# Altium PCB Solo_Edison.PcbDoc
Units mm, origin at the board's own origin, x right, y up, seen from the top; angles counter-clockwise.
Board outline 76.36 x 81.86 mm, 2 copper layers (Top Layer, Bottom Layer), stack 1.571 mm thick; 47 components, 99 nets, 304 pads, 76 vias.
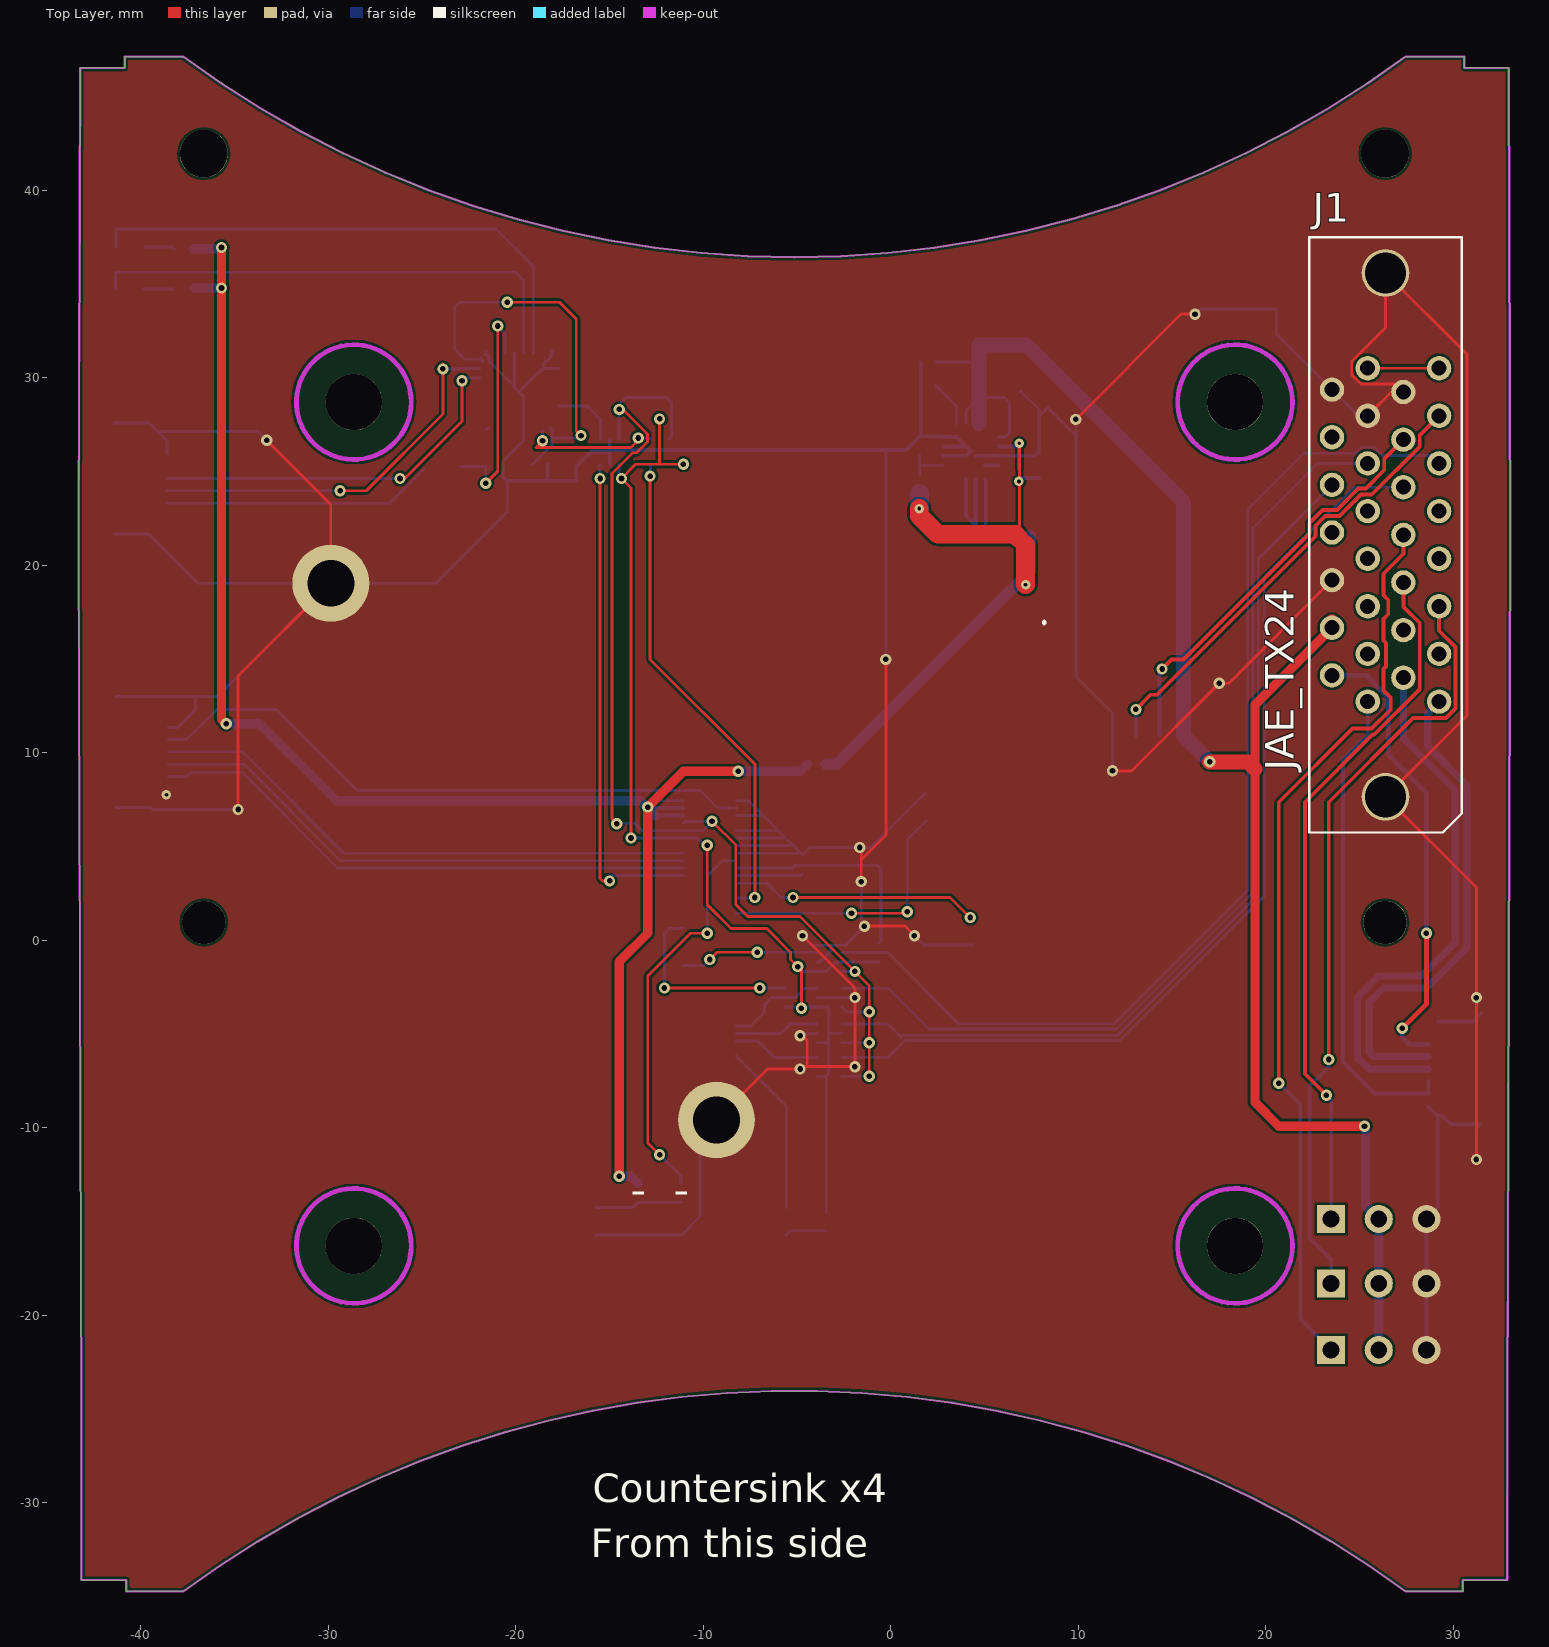
[diagram p0: Top Layer view]
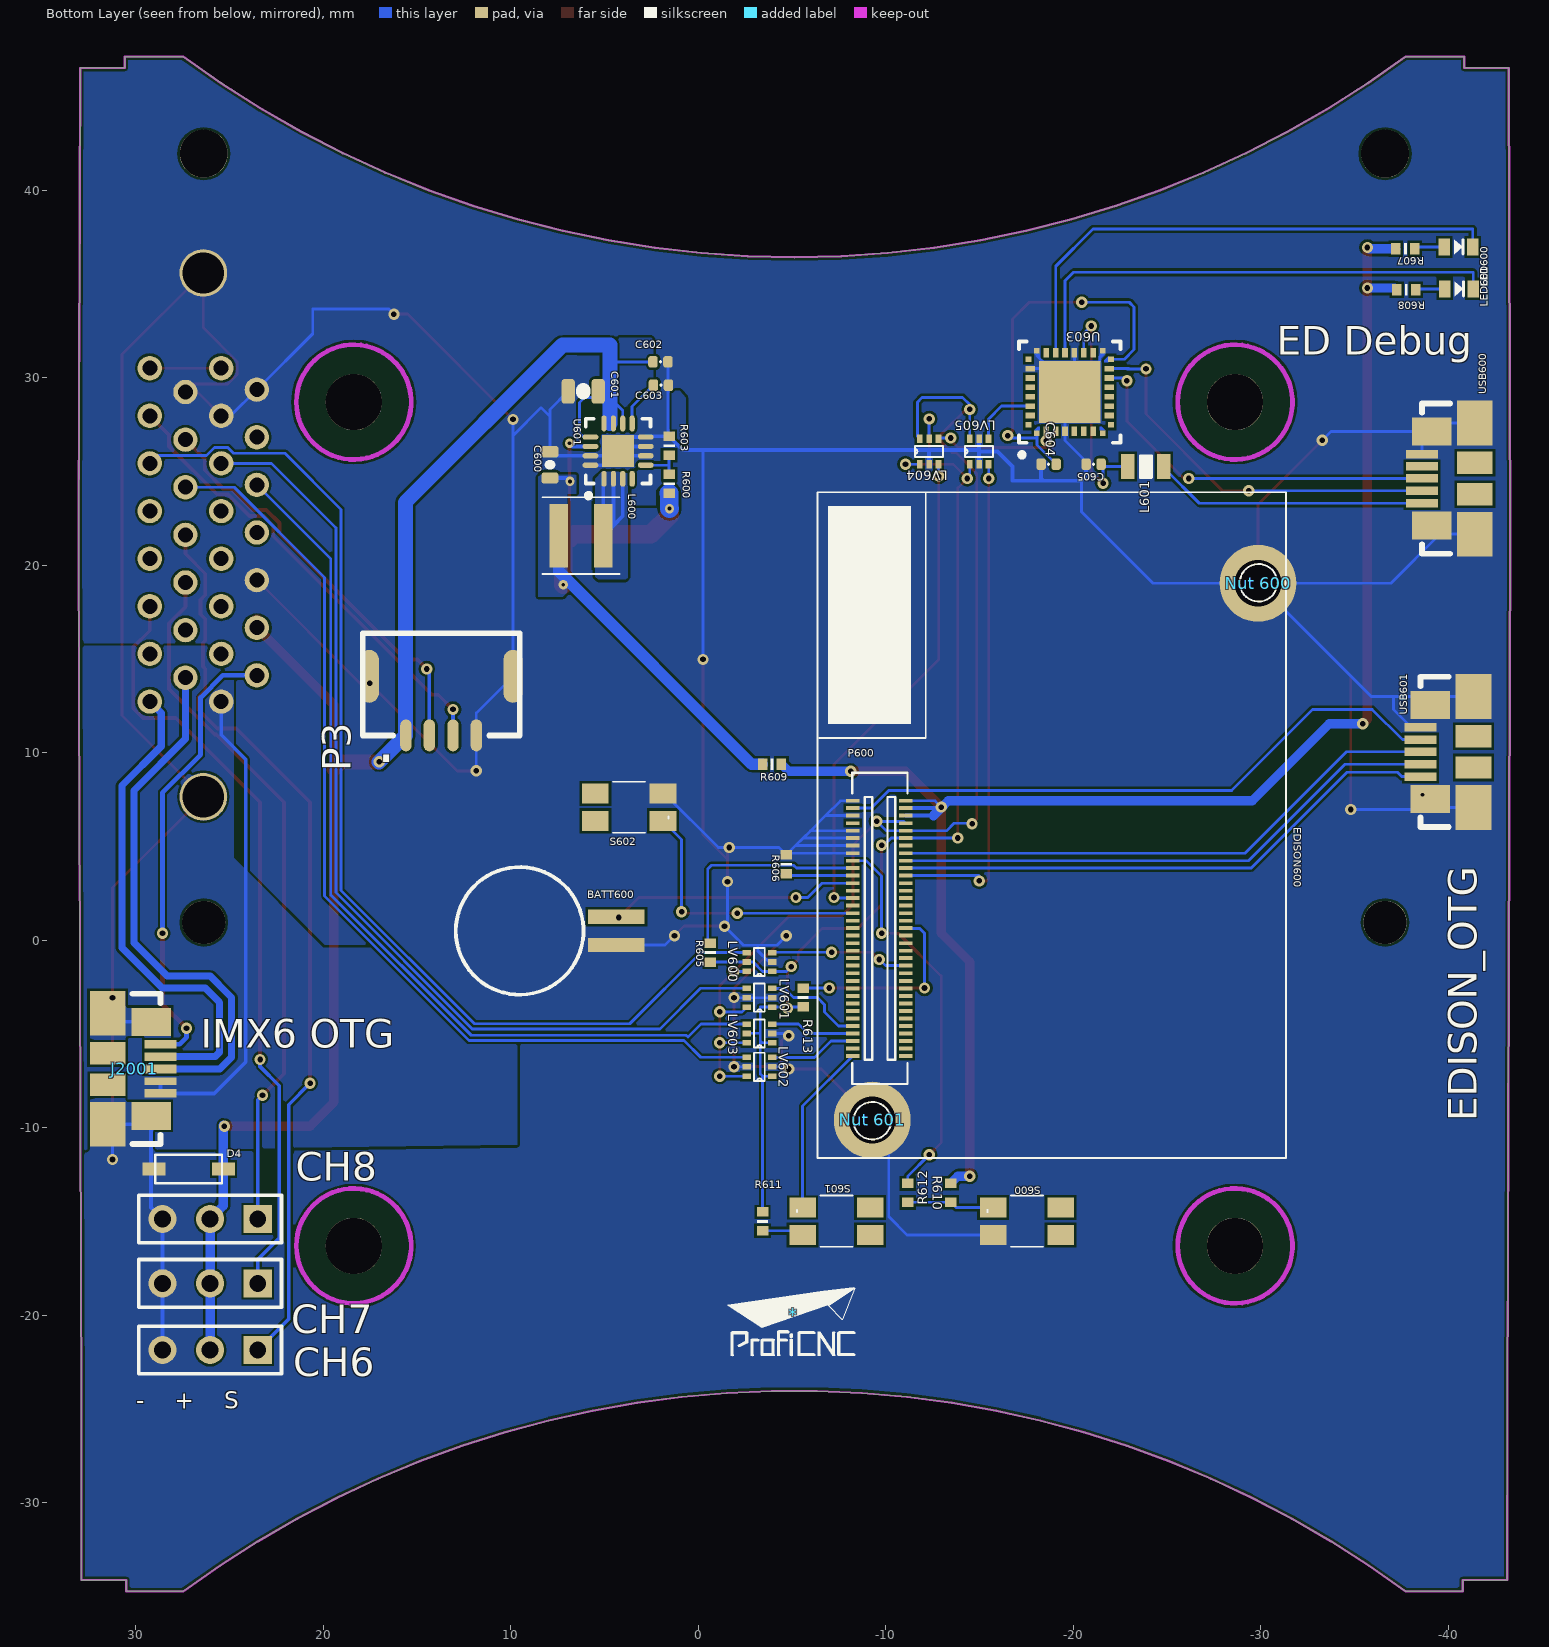
[diagram p1: Bottom Layer view, seen from below]
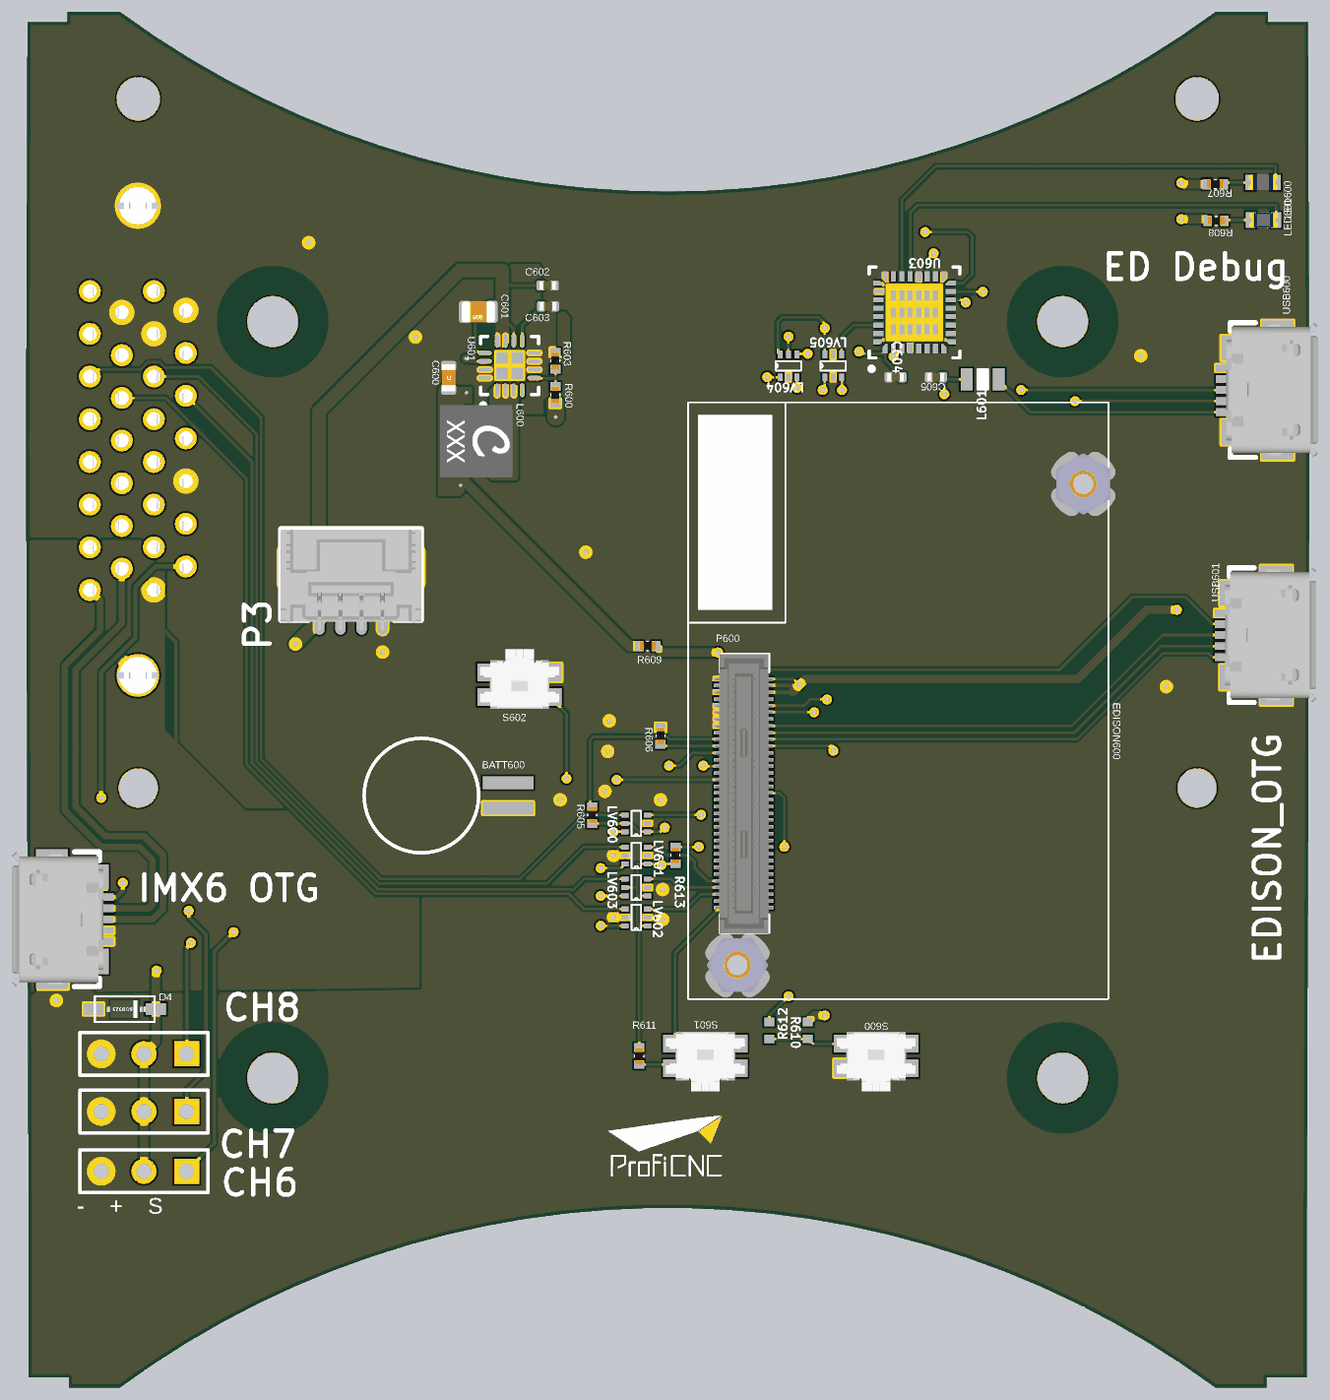
[diagram p2: 3D render of the assembled board from below, using the file's embedded part models]

## Layer stack, top to bottom
Top Layer: signal copper 0.0356
Dielectric: core 1.5, FR-4, Dk 4.2
Bottom Layer: signal copper 0.0356

## Board outline
-40.768,-34.72 -37.732,-34.72 -35.763,-33.337 -33.735,-32.041 -31.653,-30.836 -29.519,-29.722 -27.34,-28.703 -25.117,-27.779 -22.857,-26.955 -20.562,-26.229 -18.238,-25.605 -15.889,-25.083 -13.519,-24.664 -11.134,-24.349 -8.736,-24.139 -6.332,-24.034 -3.926,-24.034 -1.522,-24.139 0.876,-24.349 3.261,-24.664 5.631,-25.083 7.98,-25.605 10.304,-26.229 12.599,-26.955 14.859,-27.779 17.082,-28.703 19.261,-29.722 21.395,-30.836 23.477,-32.041 25.505,-33.337 27.474,-34.72 30.51,-34.72 30.51,-34.11 32.894,-34.11 32.896,-25.039 32.974,-1.783 33.05,21.459 32.966,46.528 30.594,46.528 30.591,47.138 27.474,47.138 25.434,45.707 23.33,44.37 21.168,43.13 18.953,41.988 16.688,40.949 14.378,40.012 12.028,39.182 9.643,38.458 7.228,37.844 4.787,37.339 2.326,36.946 -0.151,36.664 -2.637,36.495 -5.129,36.438 -7.621,36.495 -10.107,36.664 -12.584,36.946 -15.045,37.339 -17.486,37.844 -19.901,38.458 -22.286,39.182 -24.636,40.012 -26.946,40.949 -29.211,41.988 -31.427,43.13 -33.588,44.37 -35.692,45.707 -37.732,47.138 -40.849,47.138 -40.852,46.528 -43.224,46.528 -43.308,21.459 -43.232,-1.783 -43.154,-25.039 -43.152,-34.11 -40.768,-34.11

## Design rules (kind name [scope] priority, off if disabled: settings)
Clearance [All] p1: gap=0.127
ComponentClearance edison [InComponent('EDISON600')] p1: gap=0 collisioncheckmode=3 verticalgap=0 showdistances=FALSE
ComponentClearance [All] p2: gap=0.254 collisioncheckmode=3 verticalgap=0.254 showdistances=FALSE
DiffPairsRouting [All] p1: maxlimit=0.254 minlimit=0.254 mostfreqgap=0.254 maxuncoupledlength=12.7
HoleSize [All] p1: absolutevalues=TRUE maxlimit=7.62 minlimit=0.025 maxpercent=80.000 minpercent=20.000
MinimumSolderMaskSliver [All] p1 off: minsoldermaskwidth=0.15
PolygonConnect [All] p1: connectstyle=Direct reliefconductorwidth=0.254 reliefentries=4 polygonreliefangle="90 Angle" airgapwidth=0.254
RoutingVias [All] p1: holewidth=0.711 width=1.27 viastyle="Through Hole" minholewidth=0.3 minwidth=0.6 maxholewidth=0.711 maxwidth=1.27
SilkToSilkClearance [All] p1 off: silktosilkclearance=0.254
SilkToSolderMaskClearance [IsPad] p1 off: minsilkscreentomaskgap=0.254 clearancetoexposedcopper=TRUE
SolderMaskExpansion [All] p1: expansion=0.102
Width [All] p1: maxlimit=5 minlimit=0.15 preferedwidth=0.254 minimp=50.000000 maximp=50.000000 favimp=50.000000
22 further rules are at their usual default settings.

## Classes and differential pairs
differential pair D: +D_P -D_N

## Components (designator, comment, footprint, x,y, rotation, side; value= is the part's Value field where it differs from the comment)
* "ProfiCNC_LOGO" ProfiCNC_medium -5.08,-19.939 r180 bottom
BATT600 "" MS621FE 9.525,0.508 r180 bottom
C600 "" 0603-CAP 7.909,25.362 r90 bottom
C601 "10.00UF" 0805-CAP 6.137,29.285 r0 bottom
C602 "0u1" 0402-CAP 2.016,30.855 r180 bottom
C603 "33000pf" 0402-CAP 1.991,29.61 r180 bottom
C604 "0u1" 0402-CAP -18.684,25.4 r0 bottom
C605 "0u1" 0402-CAP -21.082,25.4 r0 bottom
CH6 "Header 3" HDR1X3 23.495,-21.844 r0 bottom
CH7 "Header 3" HDR1X3 23.495,-18.288 r0 bottom
CH8 "Header 3" HDR1X3 23.495,-14.859 r0 bottom
D4 "MMSZ5232BT1G" SOD-123 27.178,-12.192 r0 bottom
EDISON600 "Ed" ED -29.88,19.074 r0 bottom locked
J1 "JAE_TX24" "JAE TX24" 26.396,7.659 r180 top locked
J2001 "47346-0001" MOLEX-47346-0001#1 31.496,-6.858 r180 bottom
L600 "XFL4020-222MEB" XFL4020 6.258,21.584 r0 bottom
L601 "" 0805-IND -23.876,25.273 r0 bottom
LED600 "BLUE" 0603-LED-BLUE -40.554,36.983 r0 bottom
LED601 "BLUE" 0603-LED-BLUE -40.58,34.748 r0 bottom
LV600 "SN74LVC1T45" DRL -3.937,-1.651 r0 bottom
LV601 "SN74LVC1T45" DRL -3.937,-3.556 r0 bottom
LV602 "SN74LVC1T45" DRL -3.937,-7.239 r0 bottom
LV603 "SN74LVC1T45" DRL -3.937,-5.461 r0 bottom
LV604 "SN74LVC1T45" DRL -11.811,25.4 r90 bottom
LV605 "SN74LVC1T45" DRL -14.478,25.4 r90 bottom
"Nut 600" "PEM-SMTSO-M1.6-2-ET" PEM-SMTSO-M1.6-2-ET -29.855,19.049 r180 bottom locked
"Nut 601" "PEM-SMTSO-M1.6-2-ET" PEM-SMTSO-M1.6-2-ET -9.281,-9.577 r270 bottom locked
P3 "CLICKMATE_1.25_4" CLICKMATE_V4 13.716,16.383 r180 bottom
P600 "DF40-70_RECEPTICAL" DF40-70_RECEPTICAL -9.687,0.498 r180 bottom locked
R600 "47K  1%" 0402-RES#1 1.559,24.352 r270 bottom
R603 "10.5K  1%" 0402-RES#1 1.559,26.384 r270 bottom
R605 "100K" 0402-RES#1 -0.635,-0.651 r270 bottom
R606 "10K" 0402-RES#1 -4.699,4.064 r270 bottom
R607 "220R" 0402-RES#1 -37.709,36.882 r0 bottom
R608 "220R" 0402-RES#1 -37.76,34.697 r0 bottom
R609 "0R" 0402-RES#1 -3.937,9.398 r0 bottom
R610 "10K" 0402-RES#2 -13.462,-13.462 r270 bottom
R611 "220R" 0402-RES#1 -3.429,-14.986 r90 bottom
R612 "220R" 0402-RES#2 -11.176,-13.462 r90 bottom
R613 "10K" 0402-RES#1 -5.588,-3.048 r90 bottom
S600 "Power" EVQP7J01K -17.526,-14.986 r180 bottom
S601 "FWR_RCVR" EVQP7J01K -7.366,-14.986 r180 bottom
S602 "RCVR_MODE" EVQP7J01K 3.683,7.112 r0 bottom
U601 "TPS62130RGTT" RGT16-1700X1700TP 4.277,26.095 r90 bottom
U603 "FT232RQ-Reel" PQFN5X5-32_V -19.812,29.248 r90 bottom
USB600 "MICRO USB B, BOTTOM MOUNT" MOLEX-47346-0001#2 -41.418,24.639 r0 bottom
USB601 "MICRO USB B, BOTTOM MOUNT" MOLEX-47346-0001#2 -41.342,10.059 r0 bottom

## Footprints (in the part's own frame and the unit in brackets; to place one, negate y for a bottom-side part, rotate by r counter-clockwise, add the part's x,y. Pads: shape width x height; smd on the part's side, far side on the other; paste and mask are expansions set on the pad)
0402-CAP [mil]
  rrect50% 20x24 smd mask+0: P$1(-15.75,0) P$2(15.75,0)
  silkscreen extent 0,0 0,1, body extent -20,-10 20,10, height 20
0402-RES#1 [mil] "0402-RES"
  rect 20x24 smd: P$1(-19.68,0) P$2(20,0)
  silkscreen extent -3,-12 3,12, body extent -20,-10 20,10, height 20
0402-RES#2 [mil] "0402-RES"
  rect 20x24 smd: P$1(19.68,0) P$2(-20,0)
  body extent -20,-10 20,10, height 20
0603-CAP [mil] "0603-CAP"
  rrect50% 24x36 smd mask+0: P$1(-27.56,0) P$2(27.56,0)
  silkscreen extent 0,-2 0,2, body extent -31,-16 31,16, height 34
0603-LED-BLUE [mil] "0603-LED_Blue"
  rect 24x36 smd: A(30,0) C(-29.53,0)
  silkscreen extent -9,-15 9,15, body extent -33,-18 33,18, height 35
0805-CAP [mil]
  rrect50% 28x52 smd mask+0: P$1(-31.5,0) P$2(31.5,0)
  silkscreen extent 0,-2 0,2, body extent -39,-25 39,25, height 31
0805-IND [mil]
  rect 28x52 smd: P$1(-37.4,0) P$2(38,0)
  silkscreen extent -12,-23 12,23
CLICKMATE_V4 [mil] "5023820470"
  rrect100% 24x67 smd: 1(-73.82,-214.57) 2(-24.61,-214.57) 3(25,-214.57) 4(74,-214.57)
  rrect100% 40x111 smd: GND(-150.59,-90.55) GND(151,-90.55)
  silkscreen extent -164,-215 165,0, body extent -164,-237 164,-3, height 179
DF40-70_RECEPTICAL [mil]
  rect 28x8 smd: 1(-57.09,273.5) 2(54,273.5) 3(-57.09,258.5) 4(54,258.5) 5(-57.09,242.5) 6(54,242.5) 7(-57.09,226.5) 8(54,226.5) 9(-57.09,210.5) 10(54,210.5) 11(-57.09,195.5) 12(54,195.5) 13(-57.09,179.5) 14(54,179.5) 15(-57.09,163.5) 16(54,163.5) 17(-57.09,147.5) 18(54,147.5) 19(-57.09,132.5) 20(54,132.5) 21(-57.09,116.5) 22(54,116.5) 23(-57.09,100.5) 24(54,100.5) 25(-57.09,84.5) 26(54,84.5) 27(-57.09,69.5) 28(54,69.5) 29(-57.09,53.5) 30(54,53.5) 31(-57.09,37.5) 32(54,37.5) 33(-57.09,21.5) 34(54,21.5) 35(-57.09,6.5) 36(54,6.5) 37(-57.09,-9.5) 38(54,-9.5) 39(-57.09,-25.5) 40(54,-25.5) 41(-57.09,-41.5) 42(54,-41.5) 43(-57.09,-56.5) 44(54,-56.5) 45(-57.09,-72.5) 46(54,-72.5) 47(-57.09,-88.5) 48(54,-88.5) 49(-57.09,-104.5) 50(54,-104.5) 51(-57.09,-120.37) 52(54,-120.37) 53(-57.09,-136.12) 54(54,-136.12) 55(-57.09,-151.87) 56(54,-151.87) 57(-57.09,-167.62) 58(54,-167.62) 59(-57.09,-183.37) 60(54,-183.37) 61(-57.09,-199.11) 62(54,-199.11) 63(-57.09,-214.86) 64(54,-214.86) 65(-57.09,-230.61) 66(54,-230.61) 67(-57.09,-246.36) 68(54,-246.36) 69(-57.09,-262.11) 70(54,-262.11)
  silkscreen extent -58,-321 58,332, body extent -68,-322 66,332, height 75
DRL [mm]
  rect 0.45x0.3 smd: 1(0,0) 2(0,-0.5) 3(0,-1) 4(1.35,-1) 5(1.35,-0.5) 6(1.35,0)
  silkscreen extent 0.39,-1.25 0.96,0.25, body extent 0.4,-1.2 1,0.2, height 0.6
ED [mm]
  silkscreen extent -1.47,-4.83 23.53,30.67
EVQP7J01K [mil]
  rect 56x42 smd: A1(-70.87,29) A2(71,29) B3(-70.87,-28.54) B4(71,-28.54)
  silkscreen extent -83,-53 34,54, body extent -93,-83 93,57
HDR1X3 [mm] "Connector; Header; 3 Position"
  rect 1.5x1.5 hole 0.9: 1(0,0)
  round 1.5 hole 0.9: 2(2.54,0) 3(5.08,0)
  silkscreen extent -1.27,-1.27 6.35,1.27
"JAE TX24" [mm]
  round 1.3 hole 0.8: 1(-2.856,-5.08) 2(-0.953,-6.35) 3(-2.856,-7.62) 4(-0.953,-8.89) 5(-2.856,-10.16) 6(-0.953,-11.43) 7(-2.856,-12.7) 8(-0.953,-13.97) 9(-2.856,-15.24) 10(-0.953,-16.51) 11(-2.856,-17.78) 12(-0.953,-19.05) 13(-2.856,-20.32) 14(-0.953,-21.59) 15(-2.856,-22.86) 16(0.952,-5.08) 17(2.856,-6.477) 18(0.952,-7.62) 19(2.856,-9.017) 20(0.952,-10.16) 21(2.856,-11.557) 22(0.952,-12.7) 23(2.856,-14.097) 24(0.952,-15.24) 25(2.856,-16.637) 26(0.952,-17.78) 27(2.856,-19.177) 28(0.952,-20.32) 29(2.856,-21.717) 30(0.952,-22.86)
  round 2.54 hole 2.2: TAB(0,0) TAB(0,-27.94)
  silkscreen extent -4.06,-29.84 4.06,1.91, body extent -4,-29.82 4,1.88, height 10.3
MOLEX-47346-0001#1 [mil]
  rect 67x18 smd: D+(111,0) D-(111,26) GND(111,-51.18) VBUS(111,52)
  rect 75x94 smd: GND1(0,117) GND4(0,-116.14)
  rect 83x59 smd: GND2(91,99) GND3(91,-98.43)
  rect 75x47 smd: GND5(0,-32.97) GND6(0,33)
  rect 67x15.75 smd: ID(111,-25.59)
  silkscreen extent 52,-157 111,158, body extent -94,-157 120,157, height 107
MOLEX-47346-0001#2 [mil]
  rect 67x18 smd: D+(111,0) D-(111,26) GND(111,-51.18) ID(111,-25.59) VBUS(111,52)
  rect 75x94 smd: GND1(0,117) GND4(0,-116.14)
  rect 83x59 smd: GND2(91,99) GND3(91,-98.43)
  rect 75x47 smd: GND5(0,-32.97) GND6(0,33)
  silkscreen extent 52,-157 111,158, body extent -94,-157 120,157, height 107
MS621FE [mil]
  rect 119x30 smd: 1(203,30) 2(203,-29.53)
  silkscreen extent -134,-134 134,134
PEM-SMTSO-M1.6-2-ET [mm] "Surface mount thread"
  round 4.1 hole 2.5 paste-2 mask-2: 0(0,0)
  body extent -1.59,-1.83 1.59,1.83, height 2
PQFN5X5-32_V [mm] "QFN, 32-Leads, Body 5x5mm, Pitch 0.5mm, Thermal Pad 3.3x3.3mm, FTDI Recommended"
  rect 0.3x0.3 smd paste-0.15 mask-0.15: 1(-2.2,1.75) 8(-2.2,-1.75) 9(-1.75,-2.2) 16(1.75,-2.2) 17(2.2,-1.75) 24(2.2,1.75) 25(1.75,2.2) 32(-1.75,2.2)
  rect 0.5x0.3 smd paste-0.15 mask+0.06: 2(-2.1,1.25) 3(-2.1,0.75) 4(-2.1,0.25) 5(-2.1,-0.25) 6(-2.1,-0.75) 7(-2.1,-1.25) 18(2.1,-1.25) 19(2.1,-0.75) 20(2.1,-0.25) 21(2.1,0.25) 22(2.1,0.75) 23(2.1,1.25)
  rect 0.3x0.5 smd paste-0.15 mask+0.06: 10(-1.25,-2.1) 11(-0.75,-2.1) 12(-0.25,-2.1) 13(0.25,-2.1) 14(0.75,-2.1) 15(1.25,-2.1) 26(1.25,2.1) 27(0.75,2.1) 28(0.25,2.1) 29(-0.25,2.1) 30(-0.75,2.1) 31(-1.25,2.1)
  rect 3.3x3.3 smd paste-1.65 mask+0.06: 33(0,0)
  Top Layer region: 1.6,-1.85 1.6,-2.05 1.9,-2.05 1.7,-1.85
  Top Layer region: -2.05,1.6 -1.85,1.6 -1.85,1.7 -2.05,1.9
  Top Layer region: 2.05,1.6 1.85,1.6 1.85,1.7 2.05,1.9
  Top Layer region: 2.05,-1.6 1.85,-1.6 1.85,-1.7 2.05,-1.9
  Top Layer region: -2.05,-1.6 -1.85,-1.6 -1.85,-1.7 -2.05,-1.9
  silkscreen extent -3.47,-2.7 2.7,2.7, body extent -2.55,-2.55 2.55,2.55, height 1
ProfiCNC_medium [mm] "ProfiCNC_medium"
  silkscreen extent -3.5,-2.23 3.28,1.41
RGT16-1700X1700TP [mm] "QFN, 16-Leads, Body 3x3mm, Pitch 0.5mm, Thermal Pad 1.7x1.7mm, TI Recommended"
  oval 0.85x0.28 smd paste-0.025 mask+0.07: 1(-1.475,0.75) 2(-1.475,0.25) 3(-1.475,-0.25) 4(-1.475,-0.75) 9(1.475,-0.75) 10(1.475,-0.25) 11(1.475,0.25) 12(1.475,0.75)
  oval 0.28x0.85 smd paste-0.025 mask+0.07: 5(-0.75,-1.475) 6(-0.25,-1.475) 7(0.25,-1.475) 8(0.75,-1.475) 13(0.75,1.475) 14(0.25,1.475) 15(-0.25,1.475) 16(-0.75,1.475)
  rect 1.7x1.7 smd paste-0.85 mask+0.07: 17(0,0)
  silkscreen extent -2.5,-1.73 1.73,1.73, body extent -1.57,-1.57 1.58,1.58, height 1
SOD-123 [mil] "SOD-123"
  rect 48x28 smd: A(73,0) C(-72.83,0)
  silkscreen extent -70,-30 70,30, body extent -49,-24 49,25, height 35
XFL4020 [mm] "Precision Wire Wound Inductor, 2-Leads, Body 4.00x4.00mm, IPC Medium Density"
  rect 0.98x3.4 smd: 1(-1.185,0) 2(1.185,0)
  silkscreen extent -2.05,-2.05 2.05,2.05, body extent -2.15,-2.15 2.15,2.15, height 2.1

## Part data
BATT600: library part MS621FE
C600: library part CAP0603
C601: library part CAP0805, "CAPC,X5R,0805,10.00UF,25.00V,+/-10%"
C602: library part CAP0402
C603: library part CAP0402, "CAPC,X5R,0402,0.033UF,6.3V,+/- 10%"
C604 C605: library part CAP0402, "<b>Capacitor</b> / Standard 0603 ceramic capacitor, and 0.1\" leaded capacitor."
CH6 CH7 CH8: "Header, 3-Pin"
D4: library part DIODESOD-123, "DIODE ZENER 5.6V 500MW SOD123"
J2001: library part MOLEX-47346-0001, "MICRO USB B, BOTTOM MOUNT"
L600: library part INDUCTOR-XFL4020
L601: library part INDUCTOR0805
LED600 LED601: library part LED0603, "<b>LEDs</b> / Standard schematic elements and footprints for 5mm, 3mm, 1206, and 0603 sized LEDs. 5mm - Spark Fun Electronics SKU : COM-00529 (and others)"
"Nut 600" "Nut 601": "Fastener, M1.6x0.35mm, 8.00MM Pitch, SMTSO, CS"
P3: "Connector, Rcpt, 4Pos, 1.25MM, W/B, VERT, SMD, Tin"
R600 R603 R605 R606 R609 R610 R611 R612 R613: library part RESISTOR0402-RES
R607 R608: library part RESISTOR0402-RES, "<b>Resistor</b> / Basic schematic elements and footprints for 0603, 1206, and PTH 1/10th watt (small) resistors."
S600 S601 S602: library part SWITCH-MOMENTARY-2
U601: "Buck Step Down Regulator with 3 to 17 V Input and 0.9 to 6 V Output, -40 to 85 degC, 16-Pin QFN (RGT), Green (RoHS & no Sb/Br)"
U603: "USB UART Asynchronous Serial Data Transfer Chip, 32-pin QFN, Tape and Reel"
USB600 USB601: library part MOLEX-47346-0001

## Free pads (board coordinates)
  round 2.305 hole 2.305: 1(-36.629,0.959) 1(26.371,0.959)
  round 2.555 hole 2.555: 1(-36.629,41.959) 1(26.371,41.959)
  round 3 hole 3: 1(-28.629,-16.291) 1(-28.629,28.709) 1(18.371,-16.291) 1(18.371,28.709)

## Via types
v1: diameter 0.6, hole 0.3, Top Layer to Bottom Layer, 71 vias
v2: diameter 0.5, hole 0.2, Top Layer to Bottom Layer, tented both sides, 5 vias

## Nets (pads, with @x,y where several pads share a name; then routed paths per layer and width w, separated by ;. In a path a pad name is that pad's centre, name@x,y a point inside that pad or via, vN(x,y) a via of type N, cw(c..) or ccw(c..) an arc to the next point about the centre after c; other vN are vias at no path point)
1V8: LV600.1 LV600.5 LV601.1 LV602.1 LV603.1 LV603.5 LV604.1 LV604.5 LV605.1 P600.12 R605.P$2 R611.P$2 R613.P$1 | length 64.1
  Top Layer w0.15: v1(-13.843,5.461) -13.843,24.13 v1(-14.351,24.638) -13.589,25.4 -12.319,25.4 ; v1(-12.319,27.813) -12.319,25.4 ; v1(-11.049,25.4) -12.319,25.4 ; v1(-9.779,5.08) -9.779,1.905 -8.509,0.635 -6.604,0.635 -5.334,-0.635 -5.334,-1.016 v1(-4.953,-1.397) -4.758,-1.592 v1(-4.758,-3.624)
  Bottom Layer w0.15: LV605.1 -14.478,24.765 v1(-14.351,24.638) ; v1(-13.843,5.461) -13.843,5.464 P600.12 -10.29,5.464 -9.906,5.08 v1(-9.779,5.08) ; v1(-12.319,27.813) -12.311,27.805 LV604.5 ; LV604.1 v1(-11.049,25.4) ; R613.P$1 -5.58,-3.556 v1@-4.758,-3.556 ; v1(-4.953,-1.397) -4.699,-1.651 LV600.1 -3.429,-1.651 -2.929,-1.151 LV600.5 -2.585,-1.149 R605.P$2@-0.635,-1.149 ; v1(-4.758,-3.624) v1@-4.758,-3.556 ; LV602.1 -3.429,-7.239 ; LV603.1 -3.429,-5.461 -3.302,-5.334 ; R611.P$2 -3.429,-7.239 ; LV603.5 -2.595,-4.953 -3.302,-4.953 ; v1@-4.758,-3.556 LV601.1 -3.302,-3.556 -3.302,-4.953 ; -3.429,-7.239 -3.302,-7.112 -3.302,-5.334 ; -3.302,-5.334 -3.302,-4.953
3DRID: J1.27
3V3: LV600.6 LV601.6 LV602.6 LV603.6 LV604.6 LV605.6 P600.8 P600.10 | length 61.6
  Top Layer w0.15: v1(-14.605,6.223) -14.853,6.471 -14.853,24.898 -13.739,26.012 -13.537,26.012 -12.96,26.589 -12.96,27.005 -14.276,28.321 v1(-14.478,28.321) ; v1(-9.525,6.35) -8.255,5.08 -8.255,1.905 -7.62,1.27 -4.826,1.27 v1(-1.905,-1.651) -1.143,-2.413 v1(-1.143,-3.81) v1(-1.143,-5.461) v1(-1.143,-7.239)
  Bottom Layer w0.15: v1@-14.58,6.248 -13.645,6.248 -13.242,5.845 P600.10 -10.03,5.845 v1(-9.525,6.35) -10.96,6.35 P600.8 ; LV605.6 v1(-14.478,28.321) -14.478,28.575 -14.097,28.956 -11.938,28.956 -11.684,28.702 -11.684,26.877 LV604.6 ; LV602.6 v1(-1.143,-7.239) ; LV603.6 v1(-1.143,-5.461) ; LV601.6 -2.333,-3.81 v1(-1.143,-3.81) ; LV600.6 v1(-1.905,-1.651)
4V38: C600.P$1 L600.2 R600.P$2 R609.P$2 U601.14 | length 34.1
  Top Layer w0.15: 6.867,25.146 6.867,21.431 7.198,21.101
  Top Layer w0.2: 6.867,25.146 v2(6.867,26.511)
  Top Layer w1: v2(1.533,23.031) 1.533,22.65 2.524,21.66 6.639,21.66 6.867,21.431 ; v2(7.198,18.967) 7.198,21.101
  Bottom Layer w0.2: U601.14 6.701,26.345 v2(6.867,26.511) ; v2(6.842,24.479) 7.025,24.662 C600.P$1
  Bottom Layer w0.6: R609.P$2 -2.85,9.398 7.443,19.69 L600.2
  Bottom Layer w1: v2(1.533,23.031) 1.545,23.043 1.545,23.831 R600.P$2
+5V: C601.P$1 C602.P$1 CH6.2 CH7.2 CH8.2 D4.C J1.19 P3.1 U601.10 U601.11 U601.12 U601.13 | length 88.9
  Top Layer w0.5: J1.19 19.431,12.567 19.431,9.144 19.431,-8.636 20.701,-9.906 v1(25.273,-9.906)
  Top Layer w0.8: v1(17.018,9.525) 19.05,9.525 19.431,9.144 ; J1.19 J1.19@23.54,16.973
  Bottom Layer w0.15: C602.P$1 4.592,30.855 4.713,30.734 ; U601.10 4.027,28.27 4.713,28.956 4.713,29.083 ; C601.P$1@5.166,28.95 6.08,28.95 6.334,28.696 6.334,27.07 6.109,26.845 U601.13
  Bottom Layer w0.5: v1(25.273,-9.906) 25.328,-9.851 D4.C 25.328,-14.152 CH8.2 CH6.2@26.035,-21.59
  Bottom Layer w0.8: 4.713,27.57 4.713,28.956 ; 4.713,29.083 4.713,30.734 4.713,31.75 7.239,31.75 15.621,23.368 15.621,10.922 v1(17.018,9.525)
+5V_USB: J1.17 J2001.VBUS | length 24.5
  Top Layer w0.254: v1(27.292,-4.686) 28.575,-3.404 v1(28.575,0.381)
  Bottom Layer w0.254: J1.17 25.361,14.136 26.543,12.954 26.543,9.906 28.575,7.874 v1(28.575,0.381) ; v1(27.292,-4.686) 27.292,-5.169 27.661,-5.537 J2001.VBUS
BATT: J1.15 J1.30 | length 3.8
  Top Layer w0.15: J1.30 J1.15
"BUS ID": J1.23 | length 0
  Bottom Layer w0.2: J1.23 J1.23@23.54,21.776
CANH1: J1.12 P3.2 | length 22.2
  Top Layer w0.2: v1(14.478,14.478) 14.981,14.981 15.621,14.981 22.336,21.696 22.336,22.255 23.041,22.96 23.802,22.96 24.945,24.103 25.348,24.103 26.321,25.076 26.321,25.681 J1.12
  Bottom Layer w0.2: P3.2 14.341,14.341 v1(14.478,14.478)
CANL1: J1.13 P3.3 | length 24.7
  Top Layer w0.2: v1(13.081,12.319) 13.863,13.101 14.204,13.101 22.663,21.561 22.663,22.119 23.177,22.633 23.938,22.633 25.081,23.776 25.656,23.776 28.226,26.346 28.226,26.953 J1.13
  Bottom Layer w0.2: P3.3 v1(13.081,12.319)
D_N: J1.1 J2001.D- | length 26.6
  Bottom Layer w0.381: J2001.D- 25.756,-6.198 25.527,-5.969 25.527,-3.302 26.289,-2.54 28.584,-2.54 30.734,-0.39 30.734,8.264 28.643,10.355 28.643,12.13 J1.1
D_P: J1.2 J2001.D+ | length 28.9
  Bottom Layer w0.381: J1.2 27.349,10.751 30.099,8.001 30.099,-0.127 28.321,-1.905 26.026,-1.905 25.078,-2.853 24.892,-3.039 24.892,-6.232 25.078,-6.418 25.518,-6.858 J2001.D+
FAULT: P600.19 R605.P$1 | length 11.9
  Bottom Layer w0.15: P600.19 -5.236,3.864 -5.087,4.012 -0.71,4.012 -0.508,3.81 -0.508,-0.024 R605.P$1
FMU-SWCLK: J1.18
FMU-SWDIO: J1.3
FW_RCVR: P600.69 S601.A1 | length 9.2
  Bottom Layer w0.15: P600.69 -5.566,-8.83 S601.A1
GND: "Nut 600.0" "Nut 601.0" BATT600.2 C600.P$2 C601.P$2 C602.P$2 C603.P$2 C604.P$2 C605.P$2 CH6.3 CH7.3 CH8.3 D4.A J1.14 J1.21 J1.28 J1.29 J1.TAB J2001.GND1 J2001.GND2 J2001.GND3 J2001.GND4 LV600.2 LV601.2 LV601.5 LV602.2 LV602.5 LV603.2 LV604.2 LV605.2 LV605.5 P3.4 P3.GND P600.1 P600.5 P600.9 P600.11 P600.13 P600.15 R603.P$1 R606.P$1 S600.B3 S602.B3 U601.6 U601.7 U601.8 U601.15 U601.16 U601.17 U603.4 U603.17 U603.20 U603.24 U603.26 U603.33 USB600.GND USB600.GND1 USB600.GND2 USB600.GND3 USB600.GND4 USB601.GND USB601.GND1 USB601.GND2 USB601.GND3 USB601.GND4 | length 381.8
  Top Layer w0.15: v1(-34.798,6.985) -34.798,14.106 -29.855,19.049 -29.855,23.251 v1(-33.274,26.67) ; -9.281,-9.577 -6.562,-6.858 v1(-4.826,-6.858) -4.699,-6.731 -4.445,-6.731 ; v1(-4.826,-5.08) -4.699,-5.08 -4.445,-5.334 -4.445,-6.731 ; v1(-4.699,0.254) -1.905,-2.54 v1(-1.905,-3.048) v1(-1.905,-6.731) -4.445,-6.731 ; v1(-1.651,4.953) -1.561,4.863 -1.561,4.318 ; v1(-1.561,3.138) -1.561,4.318 ; v1(-1.397,0.762) 0.762,0.762 v1(1.27,0.254) ; v1(-0.254,14.986) -0.254,5.625 -1.561,4.318 ; v1(9.881,27.788) 15.494,33.401 v1(16.231,33.401) ; v1(11.836,9.042) 12.852,9.042 v1(17.526,13.716) 18.04,13.716 J1.21 ; J1.28 26.714,29.249 J1.14 26.931,29.667 25.091,29.667 24.592,30.166 24.592,30.872 26.396,32.676 26.396,35.599 30.734,31.261 30.734,11.997 26.396,7.659 31.242,2.813 v1(31.242,-3.048) v1(31.242,-11.684)
  Bottom Layer w0.15: USB600.GND1 -39.564,21.667 -36.945,19.049 -29.855,19.049 ; USB600.GND4 -39.556,27.589 USB600.GND3 ; USB601.GND1 -39.487,7.088 -39.385,6.985 v1(-34.798,6.985) ; USB601.GND4 -37.084,13.009 ; USB600.GND -38.598,26.631 USB600.GND3 ; USB601.GND -38.044,11.359 -37.084,12.319 -37.084,13.009 ; v1(-33.274,26.67) -33.743,27.139 USB600.GND3 ; U603.17 -21.562,31.246 -21.414,31.098 -21.414,30.896 U603.33@-20.062,29.544 ; C605.P$2 -20.682,25.546 -19.562,26.666 U603.4 -19.562,28.998 U603.33 ; -20.447,24.511 -20.447,22.86 -24.258,19.049 -29.855,19.049 ; U603.20 U603.33@-20.062,29.544 ; U603.24 -18.062,31.162 -18.328,30.896 -18.364,30.896 -18.524,30.736 U603.33@-18.524,30.498 ; U603.26 U603.33@-18.524,30.498 ; S600.B3 -11.139,-15.711 -10.16,-14.732 -10.16,-10.456 -9.281,-9.577 ; P600.15 R606.P$1@-4.786,4.651 ; P600.13 -5.193,5.058 ; P600.11 -5.599,5.464 ; P600.9 -5.98,5.845 ; P600.5 -6.793,6.658 ; P600.1 -7.58,7.445 -6.793,6.658 ; v1(-4.826,-6.858) -4.707,-6.739 LV602.2 ; v1(-4.826,-5.08) -4.707,-4.961 LV603.2 ; v1(-4.699,0.254) -4.191,-0.254 -3.175,-0.254 ; LV601.2 LV601.5 -1.913,-3.056 v1(-1.905,-3.048) ; LV600.2 -3.776,-1.151 -3.175,-0.55 -3.175,-0.254 ; LV602.5 -1.913,-6.739 v1(-1.905,-6.731) ; v1@-1.561,0.598 -2.413,-0.254 -3.175,-0.254 ; v1@-1.561,0.762 v1(-1.561,3.138) ; v1(-0.254,14.986) -0.254,26.154 ; v1(1.27,0.254) 1.766,-0.242 BATT600.2 ; R603.P$1@1.616,26.941 C602.P$2 ; S602.B3 1.814,7.837 -1.07,4.953 v1(-1.651,4.953) -4.31,4.953 R606.P$1 R606.P$1@-4.786,4.651 ; C601.P$2 7.909,28.314 7.909,27.94 ; C600.P$2 7.909,27.94 ; v1(9.881,27.788) 9.881,26.915 ; v1(11.836,9.042) P3.4 11.836,12.127 9.881,14.083 9.881,26.915 ; v1(16.231,33.401) 16.51,33.68 20.563,33.68 20.563,32.353 J1.29 J1.28@24.937,27.979 ; v1(31.242,-11.684) 31.242,-10.062 J2001.GND4 ; -37.084,13.009 -35.894,13.009 -29.855,19.049 ; U603.33@-20.062,29.544 -20.062,29.498 U603.33 ; U603.33 -18.751,30.308 -18.714,30.308 U603.33@-18.524,30.498 ; -6.793,6.658 -5.98,5.845 ; -5.98,5.845 -5.599,5.464 ; -5.599,5.464 -5.193,5.058 ; -5.193,5.058 R606.P$1@-4.786,4.651 ; 7.909,27.94 8.382,28.413 9.881,26.915
  Bottom Layer w0.2: C605.P$2 -20.682,24.746 -20.447,24.511 -18.415,24.511 ; C604.P$2 -18.284,24.642 -18.415,24.511 ; LV605.2 -14.978,26.075 ; LV605.5 -14.978,26.075 ; LV604.2 -12.311,26.154 ; U601.6 4.027,25.845 U601.17 U601.17@4.027,26.345 ; U601.7 U601.17@4.027,26.345 ; U601.17@4.527,25.845 U601.15 7.692,25.845 C600.P$2 ; U601.17@5.027,25.345 U601.16 ; J1.28@24.937,27.979 J1.28 ; CH6.3 CH7.3 CH8.3@28.575,-14.986 ; CH8.3 29.185,-14.249 J2001.GND3 ; J2001.GND3@28.677,-8.85 J2001.GND3 ; J2001.GND2 31.039,-4.343 J2001.GND1 ; J2001.GND4 29.874,-9.808 29.424,-9.358 J2001.GND3 ; -18.415,24.511 -16.764,24.511 -16.764,25.273 -15.962,26.075 -14.978,26.075 ; -14.978,26.075 -14.899,26.154 -12.311,26.154 ; -12.311,26.154 -0.254,26.154 0.829,26.154 R603.P$1 2.763,26.884 U601.8 3.527,26.845 U601.17@4.027,26.345
  other v2: -38.624,7.773
GP12_PWM0: P600.35
GP13_PWM1: P600.33
GP14: P600.48
GP15: P600.42
GP40: P600.52
GP41: P600.54
GP42: P600.50
GP43: P600.56
GP44: P600.24
GP45: P600.26
GP46: P600.28
GP47: P600.30
GP48: P600.32
GP49: P600.34
GP165: P600.25
GP182_PWM2: P600.37
GP183_PWM3: P600.39
I2C_1_SCL_ED: P600.41
I2C_1_SDA_ED: P600.43
I2C_6_SCL: P600.45
I2C_6_SDA: P600.47
IO-PWM6: CH6.1 J1.8 | length 48.9
  Top Layer w0.2: v1(20.701,-7.62) 20.701,7.366 24.638,11.303 25.654,11.303 26.67,12.319 26.67,12.954 26.289,13.335 26.289,14.478 26.416,14.605 26.416,15.875 26.289,16.002 26.289,17.145 26.543,17.399 26.543,18.161 26.289,18.415 26.289,19.558 27.349,20.618 J1.8
  Bottom Layer w0.2: v1(20.701,-7.62) 21.844,-8.763 21.844,-20.193 CH6.1 CH6.1@23.749,-21.844
IO-PWM7: CH7.1 J1.5 | length 41.2
  Top Layer w0.2: v1(23.368,-6.35) 23.368,7.366 27.864,11.862 29.615,11.862 30.129,12.376 30.129,15.642 29.252,16.519 J1.5
  Bottom Layer w0.2: v1(23.368,-6.35) 23.368,-6.731 22.352,-7.747 22.352,-15.875 23.495,-17.018 CH7.1
IO-PWM8: CH8.1 J1.6 | length 37.5
  Top Layer w0.2: v1(23.241,-8.255) 22.098,-7.112 22.098,7.366 25.708,10.976 25.789,10.976 28.226,13.413 28.226,16.912 27.349,17.789 J1.6
  Bottom Layer w0.2: v1(23.241,-8.255) 23.495,-8.509 CH8.1
IO-SWCLK: J1.20
IO-SWDIO: J1.4
"IO-USART1 RX": J1.22
"IO-USART1 TX": J1.7
MSIC_SLP_CLK3: P600.7
NetC603_P$1: C603.P$1 U601.9 | length 2.5
  Bottom Layer w0.15: C603.P$1 3.527,28.474 U601.9
NetC604_P$1: C604.P$1 U603.1 U603.16 | length 20.8
  Top Layer w0.15: v1(-20.447,34.036) -17.653,34.036 -16.764,33.147 -16.764,27.178 v1(-16.51,26.924)
  Bottom Layer w0.15: U603.16 -22.723,30.998 -23.241,31.516 -23.241,33.782 -22.987,34.036 v1(-20.447,34.036) ; C604.P$1 -18.062,26.422 -18.062,26.797 ; U603.1@-18.062,27.198 U603.1 -18.062,26.797 ; v1(-16.51,26.924) -16.637,26.797 -18.062,26.797
NetC605_P$1: C605.P$1 L601.P$2 U603.19 | length 12.5
  Top Layer w0.15: v1(-21.59,24.384) -20.955,25.019 v1(-20.955,32.766)
  Bottom Layer w0.15: L601.P$2 -21.609,25.273 -21.59,25.292 v1(-21.59,24.384) ; v1(-20.955,32.766) -20.562,32.373 U603.19
NetL600_P$1: L600.1 U601.1 U601.2 U601.3 | length 9
  Bottom Layer w0.2: U601.3 4.027,22.63 4.527,22.13 ; U601.2 4.527,22.13 ; U601.1 5.073,24.574 L600.1 4.527,22.13
NetL601_P$1: L601.P$1 USB600.VBUS | length 14.5
  Bottom Layer w0.15: USB600.VBUS -26.72,23.318 L601.P$1@-24.892,25.146
NetLED600_A: LED600.A R607.P$1 | length 1.6
  Bottom Layer w0.15: LED600.A -38.311,36.983 R607.P$1
NetLED600_C: LED600.C U603.22 | length 28.6
  Bottom Layer w0.15: LED600.C -41.304,37.944 -21.053,37.944 -19.062,35.953 U603.22
NetLED601_A: LED601.A R608.P$1 | length 1.6
  Bottom Layer w0.15: LED601.A -38.311,34.748 R608.P$1
NetLED601_C: LED601.C U603.21 | length 26.7
  Bottom Layer w0.15: LED601.C -41.33,35.632 -20.011,35.632 -19.562,35.183 U603.21
NetR600_P$1: R600.P$1 R603.P$2 U601.5 | length 2.3
  Bottom Layer w0.15: R600.P$1 1.559,25.343 1.556,25.345 ; R603.P$2 1.559,25.348 1.556,25.345 ; U601.5 1.556,25.345
NetR610_P$1: R610.P$1 R612.P$2 S600.A1 | length 4.7
  Bottom Layer w0.15: S600.A1 -13.749,-14.249 R610.P$1 -11.184,-13.962 R612.P$2
NetR611_P$1: R611.P$1 S601.B3 | length 2.2
  Bottom Layer w0.15: S601.B3 -5.341,-15.486 R611.P$1
NetU603_14: U603.14 USB600.D+ | length 20.2
  Top Layer w0.15: v1(-26.162,24.638) -25.908,24.638 -22.86,27.686 v1(-22.86,29.845)
  Bottom Layer w0.15: USB600.D+@-38.597,24.638 v1(-26.162,24.638) ; v1(-22.86,29.845) -22.707,29.998 U603.14
NetU603_15: U603.15 USB600.D- | length 21.8
  Top Layer w0.15: v1(-29.361,23.979) -27.964,23.979 -23.876,28.067 -23.876,30.734 -24.13,30.48 v1(-23.876,30.48)
  Bottom Layer w0.15: USB600.D- v1(-29.361,23.979) ; v1(-23.876,30.48) -22.878,30.48 ; -22.969,30.498 U603.15
OSC_CLK_OUT_0: P600.67
PSW: P600.21 R606.P$2 | length 3.6
  Bottom Layer w0.15: P600.21 -4.798,3.457 R606.P$2
PWRBTN#: P600.17 R612.P$1 | length 20.8
  Top Layer w0.15: v1(-12.319,-11.43) -12.954,-10.795 -12.954,-1.905 -10.668,0.381 v1(-9.779,0.381)
  Bottom Layer w0.15: v1(-12.319,-11.43) -11.176,-12.573 R612.P$1 ; v1(-9.779,0.381) -9.779,3.429 -8.963,4.245 P600.17
RCVR_MODE: P600.31 S602.A1 | length 14.4
  Top Layer w0.15: v1(-2.086,1.451) 0.816,1.451 v1(0.889,1.524)
  Bottom Layer w0.15: P600.31 v1(-2.086,1.451) ; v1(0.889,1.524) 0.889,5.381 S602.A1
RESET_OUT#: P600.36 R613.P$2 | length 10.5
  Top Layer w0.15: v1(-12.065,-2.54) v1(-6.985,-2.54)
  Bottom Layer w0.15: v1(-12.065,-2.54) -12.065,0.381 -11.811,0.635 -11.087,0.635 P600.36 ; v1(-6.985,-2.54) R613.P$2
SD_0_CD#: P600.60
SD_0_CLK: P600.58
SD_0_CLK_FB: P600.44
SD_0_CMD: P600.62
SD_0_DAT0: P600.66
SD_0_DAT1: P600.70
SD_0_DAT2: P600.64
SD_0_DAT3: P600.68
SER2CT: J1.25 LV603.4 | length 49.1
  Bottom Layer w0.15: LV603.4 -0.143,-4.461 0.55,-5.154 0.647,-5.057 12.109,-5.057 19.604,2.438 19.604,20.36 J1.25
SER2RT: J1.10 LV602.4 | length 52.5
  Bottom Layer w0.15: LV602.4 -2.577,-6.229 -0.133,-6.229 0.762,-5.334 12.224,-5.334 19.929,2.371 19.929,19.35 24.748,24.169 J1.10
SER2RX: J1.11 LV600.4 | length 58.4
  Bottom Layer w0.15: LV600.4 -0.143,-0.651 3.651,-4.445 11.938,-4.445 19.05,2.667 19.05,22.987 22.047,25.984 24.784,25.984 25.091,26.291 25.797,26.291 26.231,25.857 28.834,25.857 J1.11
SER2TX: J1.26 LV601.4 | length 52.8
  Bottom Layer w0.15: LV601.4 -2.577,-2.546 -0.133,-2.546 2.043,-4.722 12.053,-4.722 19.327,2.552 19.327,22.004 22.762,25.439 J1.26
SER5RX: J1.9
SER5TX: J1.24
SPI_2_CLK: P600.55
SPI_2_FS0: P600.53
SPI_2_FS1: P600.51
SPI_2_RXD: P600.59
SPI_2_TXD: P600.57
UART_1_CTS: LV602.3 P600.65 | length 4.7
  Bottom Layer w0.15: P600.65 -7.087,-5.359 -6.207,-6.239 LV602.3
UART_1_RTS: LV603.3 P600.63 | length 4.5
  Bottom Layer w0.15: P600.63 -5.848,-4.959 -5.35,-4.461 LV603.3
UART_1_RX: LV601.3 P600.61 | length 5.4
  Bottom Layer w0.15: P600.61 -7.48,-4.559 -6.731,-3.81 -6.731,-3.429 -6.35,-3.048 -5.08,-3.048 -4.588,-2.556 LV601.3
UART_1_TX: LV600.3 P600.46 | length 7.4
  Top Layer w0.15: v1(-9.652,-1.016) -9.271,-0.635 v1(-7.112,-0.635)
  Bottom Layer w0.15: P600.46 -9.979,-1.343 v1(-9.652,-1.016) ; v1(-7.112,-0.635) -3.953,-0.635 LV600.3
UART_2_RX: LV605.3 P600.22 | length 26.9
  Top Layer w0.15: v1(-15.494,24.638) -15.494,3.302 -15.367,3.175 v1(-14.986,3.175)
  Bottom Layer w0.15: v1(-15.494,24.638) -15.494,25.384 LV605.3 ; v1(-14.986,3.175) -14.986,3.429 -14.958,3.457 P600.22
UART_2_RX_OUT: LV605.4 U603.30 | length 3.6
  Bottom Layer w0.15: U603.30 -16.179,28.498 -15.478,27.797 LV605.4
UART_2_TX: LV604.3 P600.27 | length 26.4
  Top Layer w0.15: v1(-12.827,24.765) -12.827,14.986 -7.239,9.398 v1(-7.239,2.286)
  Bottom Layer w0.15: v1(-12.827,24.765) -12.811,24.781 LV604.3 ; P600.27 -7.261,2.264 v1(-7.239,2.286)
UART_2_TX_OUT: LV604.4 U603.2 | length 7.4
  Top Layer w0.15: v1(-18.564,26.642) -18.917,26.289 -13.843,26.289 -13.462,26.67 v1(-13.462,26.797)
  Bottom Layer w0.15: v1(-18.564,26.642) -18.562,26.644 U603.2 ; v1(-13.462,26.797) -12.858,26.797 LV604.4
UGND: J1.16 J2001.GND J2001.ID | length 25.7
  Bottom Layer w0.2: J1.16 25.444,10.966 24.13,9.652 24.13,-6.477 25.811,-8.158 J2001.GND J2001.ID
USB_DN: P600.18 USB601.D- | length 29.6
  Bottom Layer w0.15: USB601.D- -34.485,9.399 -29.331,4.245 P600.18
USB_DP: P600.16 USB601.D+ | length 29.7
  Bottom Layer w0.15: USB601.D+ -34.57,10.059 -29.162,4.651 P600.16
USB_ID: P600.3 USB601.ID | length 33.1
  Bottom Layer w0.15: USB601.ID -37.551,10.709 -35.941,12.319 -32.766,12.319 -28.448,8.001 -10.16,8.001 -9.223,7.064 P600.3
USB_VBUS: P600.20 USB601.VBUS | length 29.7
  Bottom Layer w0.15: USB601.VBUS -37.521,8.739 -37.291,8.968 -34.593,8.968 -29.488,3.864 P600.20
V_VBAT_BKUP: BATT600.1 P600.23 | length 13.2
  Top Layer w0.15: v1(-5.207,2.286) 3.175,2.286 v1(4.242,1.219)
  Bottom Layer w0.15: P600.23 -6.607,3.051 -5.842,2.286 v1(-5.207,2.286)
VSYS: P600.2 P600.4 P600.6 R607.P$2 R608.P$2 R609.P$1 R610.P$2 | length 89.8
  Top Layer w0.5: v1(-35.687,36.957) v1(-35.687,34.798) -35.687,11.811 v1(-35.433,11.557) ; v1(-14.478,-12.573) -14.478,-1.143 -12.954,0.381 v1(-12.954,7.112) -11.049,9.017 v1(-8.128,9.017)
  Bottom Layer w0.15: v1(-12.954,7.112) -12.621,7.445 P600.2
  Bottom Layer w0.2: v1@-12.954,7.064 P600.4 ; -12.548,6.658 P600.6
  Bottom Layer w0.5: R607.P$2 -35.762,36.882 v1(-35.687,36.957) ; R608.P$2@-37.152,34.798 v1(-35.687,34.798) ; v1(-35.433,11.557) -33.655,11.557 -29.543,7.445 -13.335,7.445 -12.954,7.064 -12.548,6.658 ; v1(-14.478,-12.573) -13.843,-12.573 R610.P$2 ; v1(-8.128,9.017) -4.818,9.017 R609.P$1
pads on no net: J2001.GND5 J2001.GND6 P600.14 P600.29 P600.38 P600.40 P600.49 S600.A2 S600.B4 S601.A2 S601.B4 S602.A2 S602.B4 U601.4 U603.3 U603.5 U603.6 U603.7 U603.8 U603.9 U603.10 U603.11 U603.12 U603.13 U603.18 U603.23 U603.25 U603.27 U603.28 U603.29 U603.31 U603.32 USB600.GND5 USB600.GND6 USB600.ID USB601.GND5 USB601.GND6

## Polygon pours and split planes (outlines as drawn)
GND on Top Layer "GND" (solid, remove dead copper, pour order 15): -46.228,51.054 -47.244,50.038 -47.244,-38.1 32.131,-38.1 38.1,-32.131 40.132,-30.099 40.132,47.879 40.132,51.181 36.195,55.118 34.163,53.086 -43.688,53.086
no net on Bottom Layer "Top Layer-No Net" (solid, pour order 7): 3.546,23.215 2.276,23.215 2.276,24.002 1.921,24.358 1.87,24.364 1.032,24.364 0.676,24.786 0.676,28.949 0.981,29.311 1.718,29.311 1.921,29.069 1.921,26.974 2.397,27.126 3.533,25.99 3.546,24.84
no net on Bottom Layer "Top Layer-No Net" (solid, pour order 6): 5.814,32.134 5.814,27.639 5.433,27.258 3.782,27.258 3.794,28.535 2.995,29.391 2.41,29.671 2.41,31.999 2.512,32.134
GND on Bottom Layer "Top Layer-No Net" (solid, pour order 2): 8.409,31.649 6.487,31.649 6.487,26.13 6.427,26.075 6.397,26.048 3.905,26.048 3.905,25.201 4.506,25.201 4.506,25.146 4.566,25.092 4.806,25.31 8.319,25.31
4V38 on Bottom Layer "Top Layer-No Net" (solid, pour order 4): 6.563,24.834 8.408,24.834 8.478,24.906 8.525,24.858 8.525,18.327 7.217,18.327 6.983,18.566 6.983,23.833 6.516,23.833 6.493,23.809 6.516,23.833 6.516,24.811
NetL600_P$1 on Bottom Layer "Top Layer-No Net" (solid, pour order 5): 3.846,24.992 5.142,24.992 5.497,24.631 5.497,19.406 5.345,19.251 3.872,19.251 3.77,19.354 3.77,24.914
GND on Bottom Layer "GND" (solid, remove dead copper, pour order 13): -46.228,51.054 -47.244,50.038 -47.244,-38.1 32.131,-38.1 38.1,-32.131 40.132,-30.099 40.132,47.879 40.132,51.181 36.195,55.118 34.163,53.086 -43.688,53.086
UGND on Bottom Layer "UGND_L02_P009" (solid, remove dead copper, pour order 9): 32.974,-11.222 32.974,15.71 24.778,15.71 24.778,8.852 24.778,4.407 19.99,-0.381 9.643,-0.381 9.643,-10.909

## Keep-outs
Keep-Out Layer:
  circle w0.254: c18.371,28.709 r3.063
  circle w0.254: c-28.629,28.709 r3.063
  circle w0.254: c-28.629,-16.291 r3.063
  circle w0.254: c18.371,-16.291 r3.063
  lines w0.125: -43.308,21.459 -43.232,-1.783 -43.154,-25.039 -43.152,-34.11 -40.768,-34.11 -40.768,-34.72 -37.732,-34.72 -35.763,-33.337 -33.735,-32.041 -31.653,-30.836 -29.519,-29.722 -27.34,-28.703 -25.117,-27.779 -22.857,-26.955 -20.562,-26.229 -18.238,-25.605 -15.889,-25.083 -13.519,-24.664 -11.134,-24.349 -8.736,-24.139 -6.332,-24.034 -3.926,-24.034 -1.522,-24.139 0.876,-24.349 3.261,-24.664 5.631,-25.083 7.98,-25.605 10.304,-26.229 12.599,-26.955 14.859,-27.779 17.082,-28.703 19.261,-29.722 21.395,-30.836 23.477,-32.041 25.505,-33.337 27.474,-34.72 30.51,-34.72 30.51,-34.11 32.894,-34.11 32.896,-25.039 32.974,-1.783 33.05,21.459 32.966,46.528 30.594,46.528 30.591,47.138 27.474,47.138 25.434,45.707 23.33,44.37 21.168,43.13 18.953,41.988 16.688,40.949 14.378,40.012 12.028,39.182 9.643,38.458 7.228,37.844 4.787,37.339 2.326,36.946 -0.151,36.664 -2.637,36.495 -5.129,36.438 -7.621,36.495 -10.107,36.664 -12.584,36.946 -15.045,37.339 -17.486,37.844 -19.901,38.458 -22.286,39.182 -24.636,40.012 -26.946,40.949 -29.211,41.988 -31.427,43.13 -33.588,44.37 -35.692,45.707 -37.732,47.138 -40.849,47.138 -40.852,46.528 -43.224,46.528 -43.308,21.459

## Silkscreen, mask and mechanical layers (free items; w line width, h text height)
Top Overlay:
  lines w0.254: 8.193,16.934 8.193,16.984
  text "Countersink x4" at -15.875,-29.972 h1.52
  text "From this side" at -16.002,-32.893 h1.52
Bottom Overlay:
  text "ED Debug" at -30.861,31.242 h1.52
  text "IMX6 OTG" at 26.543,-5.715 h1.52
  text "EDISON_OTG" at -41.529,-9.652 h1.52 r270
  text "-    +    S" at 29.972,-25.273 h1.52
Mechanical 1:
  the board outline again, w0.125
Mechanical 16:
  region: 39.624,70.564 -4.876,70.564 -4.876,67.564 39.624,67.564
  rectangle: -4.749,79.375 39.751,82.375
  lines w0.3: -32.529,62.337 -34.279,62.337 -34.279,88.337 -32.529,88.337 ; -7.076,72.714 -7.076,76.964 41.924,76.964 41.924,72.714 -7.076,72.714
  lines w0.635: -55.616,151.466 ccw(c-55.616,150.196) -56.886,150.196 -56.886,108.032 ccw(c-55.616,108.032) -55.616,106.762 60.97,106.762 ccw(c60.97,108.032) 62.24,108.032 62.24,150.196 ccw(c60.97,150.196) 60.97,151.466 -44.323,151.466 ; -55.335,101.551 ccw(c-55.335,100.281) -56.605,100.281 -56.605,58.117 ccw(c-55.335,58.117) -55.335,56.847 61.251,56.847 ccw(c61.251,58.117) 62.521,58.117 62.521,100.281 ccw(c61.251,100.281) 61.251,101.551 -23.703,101.551
  text "PCB" at -53.34,151.384 h2.54
  text "IPC Level" at -51.816,147.828 h1.27
  text "2" at -19.304,147.828 h1.27
  text "RoHS" at -51.816,145.288 h1.27
  text "Yes" at -19.304,145.288 h1.27
  text "Board Material" at -51.816,142.748 h1.27
  text "FR4" at -19.304,142.748 h1.27
  text "Board Thickness/Construction" at -51.816,140.208 h1.27
  text "0.062\"   +/-0.006\"" at -19.304,140.208 h1.27
  text "2" at -19.279,137.703 h1.27
  text "Number of Layers" at -51.816,137.668 h1.27
  text "Silkscreen" at -51.816,134.874 h1.27
  text "a. Permanent, non-conductive, white, epoxy ink. MUST NOT COVER EXPOSED PADS" at -19.304,134.874 h1.27
  text "b. Mfg's UL symbol, date code, and UL flammability rating shall be permanently marked" at -19.304,132.334 h1.27
  text "Surface Finish" at -51.816,130.048 h1.27
  text "Immersion Gold" at -19.304,129.794 h1.27
  text "Copper Thickness" at -51.816,127.508 h1.27
  text "TOP & BOTTOM: 1 oz." at -19.304,127.254 h1.27
  text "Mask Color" at -51.816,125.033 h1.27
  text "Black Mask." at -19.379,125.028 h1.27
  text "Manufacturer Markings" at -51.816,122.428 h1.27
  text "NIL" at -19.304,122.428 h1.27
  text "Hole Sizes" at -51.816,119.888 h1.27
  text "Dimensions specified in the gerber files are finished sizes, plated or unplated." at -19.304,119.888 h1.27
  text "Tolerance: +/- 3mils diameter max." at -19.304,117.348 h1.27
  text "UL Rating" at -51.816,114.808 h1.27
  text "94V-0" at -19.304,114.554 h1.27
  text "Registration" at -51.816,111.76 h1.27
  text "a. Layer-to-Layer registration must be +/- 0.003 of the true position." at -19.304,111.76 h1.27
  text "b. All holes shall be located within +/- 0.003\" of the true position" at -19.05,108.966 h1.27
  text "PCB STACK-UP" at -53.059,101.468 h2.54
  text "PCB Construction" at 2.721,96.337 h1.52
  text "0.0014\"  [1oz.]" at -29.337,80.264 h1.52
  text "Top Layer" at 45.212,80.264 h1.52
  text "FR4 Core" at 45.602,74.337 h1.52
  text "0.062\"+/-0.006\"" at -53.779,74.087 h1.52
  text "0.059\"+/- 0.003\"" at -29.779,74.087 h1.52
  text "0.0014\"  [1oz.]" at -29.464,68.326 h1.52
  text "Bottom Layer" at 44.069,68.326 h1.52

## Text inside footprints (layer, text, board x,y; h text height)
BATT600: Mechanical 16 "6.8MM" at 10.725,0.208 h0.7